# EAGLE board placa (EAGLE 9.6.2)

Size 160 x 100 mm. Coordinates in mm from the lower left corner, seen from the top.
Outline: 0,0 160,0 160,100 0,100 0,0
Copper layers (1*16): Top 0.035mm / dielectric 1.5mm / Bottom 0.035mm
Design rules "default": minimum track width 6mil, minimum drill 0.35mm, track to track 6mil, track to pad 6mil, pad to pad 6mil, via to via 6mil, smd to smd 6mil, copper to edge 40mil, drill to drill 6mil, minimum pad ring 10mil, minimum via ring 8mil, stop-mask expansion 4mil, vias tented up to drill 0mil, thermal gap 10mil

## Footprints (pad centres in the part's own frame; a part is rotated, then mirrored left to right if it is on the bottom)
E2,5-7 = drill 0.813 pad 1.6: + -1.27,0 | drill 0.813 pad 1.6 octagon: - 1.27,0
A4988 = drill 1.016: 1 -6.35,8.89; 2 -6.35,6.35; 3 -6.35,3.81; 4 -6.35,1.27; 5 -6.35,-1.27; 6 -6.35,-3.81; 7 -6.35,-6.35; 8 -6.35,-8.89; 9 6.35,-8.89; 10 6.35,-6.35; 11 6.35,-3.81; 12 6.35,-1.27; 13 6.35,1.27; 14 6.35,3.81; 15 6.35,6.35; 16 6.35,8.89
1X15 = drill 1.016 long: 1 -17.78,0; 2 -15.24,0; 3 -12.7,0; 4 -10.16,0; 5 -7.62,0; 6 -5.08,0; 7 -2.54,0; 8 0,0; 9 2.54,0; 10 5.08,0; 11 7.62,0; 12 10.16,0; 13 12.7,0; 14 15.24,0; 15 17.78,0
MA04-1 = drill 1.016 long: 1 -3.81,0; 2 -1.27,0; 3 1.27,0; 4 3.81,0

## Placement (x,y rotation side)
C1  [E2,5-7]  -52.07,31.75 0 top  (outside the outline)
C2  [E2,5-7]  -62.23,31.75 0 top  (outside the outline)
C3  [E2,5-7]  -72.39,31.75 0 top  (outside the outline)
C4  [E2,5-7]  -19.05,58.42 0 top  (outside the outline)
C5  [E2,5-7]  -29.21,58.42 0 top  (outside the outline)
C7  [E2,5-7]  -39.37,58.42 0 top  (outside the outline)
IC1  1182-A4988  [A4988]  -21.59,13.97 0 top  (outside the outline)
IC2  1182-A4988  [A4988]  -38.1,13.97 0 top  (outside the outline)
IC3  1182-A4988  [A4988]  -54.61,13.97 0 top  (outside the outline)
IC4  1182-A4988  [A4988]  -71.12,13.97 0 top  (outside the outline)
IC5  1182-A4988  [A4988]  -21.59,40.64 0 top  (outside the outline)
IC6  1182-A4988  [A4988]  -38.1,40.64 0 top  (outside the outline)
JP1  [1X15]  -33.02,64.77 0 top  (outside the outline)
SV1  [MA04-1]  -59.69,64.77 0 top  (outside the outline)
SV2  [MA04-1]  -20.32,71.12 0 top  (outside the outline)
SV3  [MA04-1]  -34.29,71.12 0 top  (outside the outline)
SV4  [MA04-1]  -48.26,71.12 0 top  (outside the outline)
SV5  [MA04-1]  -62.23,71.12 0 top  (outside the outline)
SV6  [MA04-1]  -20.32,77.47 0 top  (outside the outline)
SV7  [MA04-1]  -34.29,77.47 0 top  (outside the outline)
SV8  [MA04-1]  -48.26,77.47 0 top  (outside the outline)
SV9  [MA04-1]  -62.23,77.47 0 top  (outside the outline)
SV10  [MA04-1]  -20.32,83.82 0 top  (outside the outline)
SV11  [MA04-1]  -34.29,83.82 0 top  (outside the outline)
SV12  [MA04-1]  -48.26,83.82 0 top  (outside the outline)
SV13  [MA04-1]  -62.23,83.82 0 top  (outside the outline)

## Library data of the parts
C1-C5 C7 = rcl; SPICEPREFIX: C
IC1-IC6 = pololu-stepper-driver
JP1 = pinhead
SV1-SV13 = con-lstb; OC_FARNELL: unknown; OC_NEWARK: unknown

## Nets
0: C1.- C2.- C3.- C4.- C5.- C7.- IC1.9 IC1.15 IC2.9 IC2.15 IC3.9 IC3.15 IC4.9 IC4.15 IC5.9 IC5.15 IC6.9 IC6.15 JP1.14 JP1.15 SV13.3 SV13.4
LOGICVIN: IC1.10 IC2.10 IC3.10 IC4.10 IC5.10 IC6.10 JP1.13
MOTOR1DIR: IC1.8 JP1.1
MOTOR1STEP: IC1.7 JP1.2
MOTOR2DIR: IC2.8 JP1.3
MOTOR2STEP: IC2.7 JP1.4
MOTOR3DIR: IC3.8 JP1.5
MOTOR3STEP: IC3.7 JP1.6
MOTOR4DIR: IC4.8 JP1.7
MOTOR4STEP: IC4.7 JP1.8
MOTOR5DIR: IC5.8 JP1.9
MOTOR5STEP: IC5.7 JP1.10
MOTOR6DIR: IC6.8 JP1.11
MOTOR6STEP: IC6.7 JP1.12
MOTORVIN: C1.+ C2.+ C3.+ C4.+ C5.+ C7.+ IC1.16 IC2.16 IC3.16 IC4.16 IC5.16 IC6.16 SV13.1 SV13.2
N$1: IC1.1 SV1.4
N$2: IC1.2 SV1.3
N$3: IC1.3 SV1.2
N$4: IC1.4 SV1.1
N$5: IC1.5 IC1.6
N$6: IC2.1 SV3.4
N$7: IC2.2 SV3.3
N$8: IC2.3 SV3.2
N$9: IC1.14 SV2.1
N$10: IC1.13 SV2.2
N$11: IC1.12 SV2.3
N$12: IC1.11 SV2.4
N$13: IC2.4 SV3.1
N$14: IC2.5 IC2.6
N$15: IC2.14 SV4.1
N$16: IC2.13 SV4.2
N$17: IC2.12 SV4.3
N$18: IC2.11 SV4.4
N$19: IC3.1 SV5.4
N$20: IC3.2 SV5.3
N$21: IC3.3 SV5.2
N$22: IC3.4 SV5.1
N$23: IC3.5 IC3.6
N$24: IC3.14 SV6.1
N$25: IC3.13 SV6.2
N$26: IC3.12 SV6.3
N$27: IC3.11 SV6.4
N$28: IC4.1 SV7.4
N$29: IC4.2 SV7.3
N$30: IC4.3 SV7.2
N$31: IC4.4 SV7.1
N$32: IC4.5 IC4.6
N$33: IC4.14 SV8.1
N$34: IC4.13 SV8.2
N$35: IC4.12 SV8.3
N$36: IC4.11 SV8.4
N$37: IC5.1 SV9.4
N$38: IC5.2 SV9.3
N$39: IC5.3 SV9.2
N$40: IC5.4 SV9.1
N$41: IC5.5 IC5.6
N$42: IC5.14 SV10.1
N$43: IC5.13 SV10.2
N$44: IC5.12 SV10.3
N$45: IC5.11 SV10.4
N$46: IC6.1 SV11.4
N$47: IC6.2 SV11.3
N$48: IC6.3 SV11.2
N$49: IC6.4 SV11.1
N$50: IC6.5 IC6.6
N$51: IC6.14 SV12.1
N$52: IC6.13 SV12.2
N$53: IC6.12 SV12.3
N$54: IC6.11 SV12.4

## Tracks (layer width: path | path; a pad name or v marks a point on that pad's centre or on a via)
0  (21 unrouted)
LOGICVIN  (6 unrouted)
MOTOR1DIR  (1 unrouted)
MOTOR1STEP  (1 unrouted)
MOTOR2DIR  (1 unrouted)
MOTOR2STEP  (1 unrouted)
MOTOR3DIR  (1 unrouted)
MOTOR3STEP  (1 unrouted)
MOTOR4DIR  (1 unrouted)
MOTOR4STEP  (1 unrouted)
MOTOR5DIR  (1 unrouted)
MOTOR5STEP  (1 unrouted)
MOTOR6DIR  (1 unrouted)
MOTOR6STEP  (1 unrouted)
MOTORVIN  (13 unrouted)
N$1  (1 unrouted)
N$2  (1 unrouted)
N$3  (1 unrouted)
N$4  (1 unrouted)
N$5  (1 unrouted)
N$6  (1 unrouted)
N$7  (1 unrouted)
N$8  (1 unrouted)
N$9  (1 unrouted)
N$10  (1 unrouted)
N$11  (1 unrouted)
N$12  (1 unrouted)
N$13  (1 unrouted)
N$14  (1 unrouted)
N$15  (1 unrouted)
N$16  (1 unrouted)
N$17  (1 unrouted)
N$18  (1 unrouted)
N$19  (1 unrouted)
N$20  (1 unrouted)
N$21  (1 unrouted)
N$22  (1 unrouted)
N$23  (1 unrouted)
N$24  (1 unrouted)
N$25  (1 unrouted)
N$26  (1 unrouted)
N$27  (1 unrouted)
N$28  (1 unrouted)
N$29  (1 unrouted)
N$30  (1 unrouted)
N$31  (1 unrouted)
N$32  (1 unrouted)
N$33  (1 unrouted)
N$34  (1 unrouted)
N$35  (1 unrouted)
N$36  (1 unrouted)
N$37  (1 unrouted)
N$38  (1 unrouted)
N$39  (1 unrouted)
N$40  (1 unrouted)
N$41  (1 unrouted)
N$42  (1 unrouted)
N$43  (1 unrouted)
N$44  (1 unrouted)
N$45  (1 unrouted)
N$46  (1 unrouted)
N$47  (1 unrouted)
N$48  (1 unrouted)
N$49  (1 unrouted)
N$50  (1 unrouted)
N$51  (1 unrouted)
N$52  (1 unrouted)
N$53  (1 unrouted)
N$54  (1 unrouted)